# Altium PCB Auto_Switch.PcbDoc
Units mm, origin at the board's own origin, x right, y up, seen from the top; angles counter-clockwise.
Board outline 75 x 73 mm, 2 copper layers (Top Layer, Bottom Layer); 21 components, 17 nets, 64 pads, 18 vias.
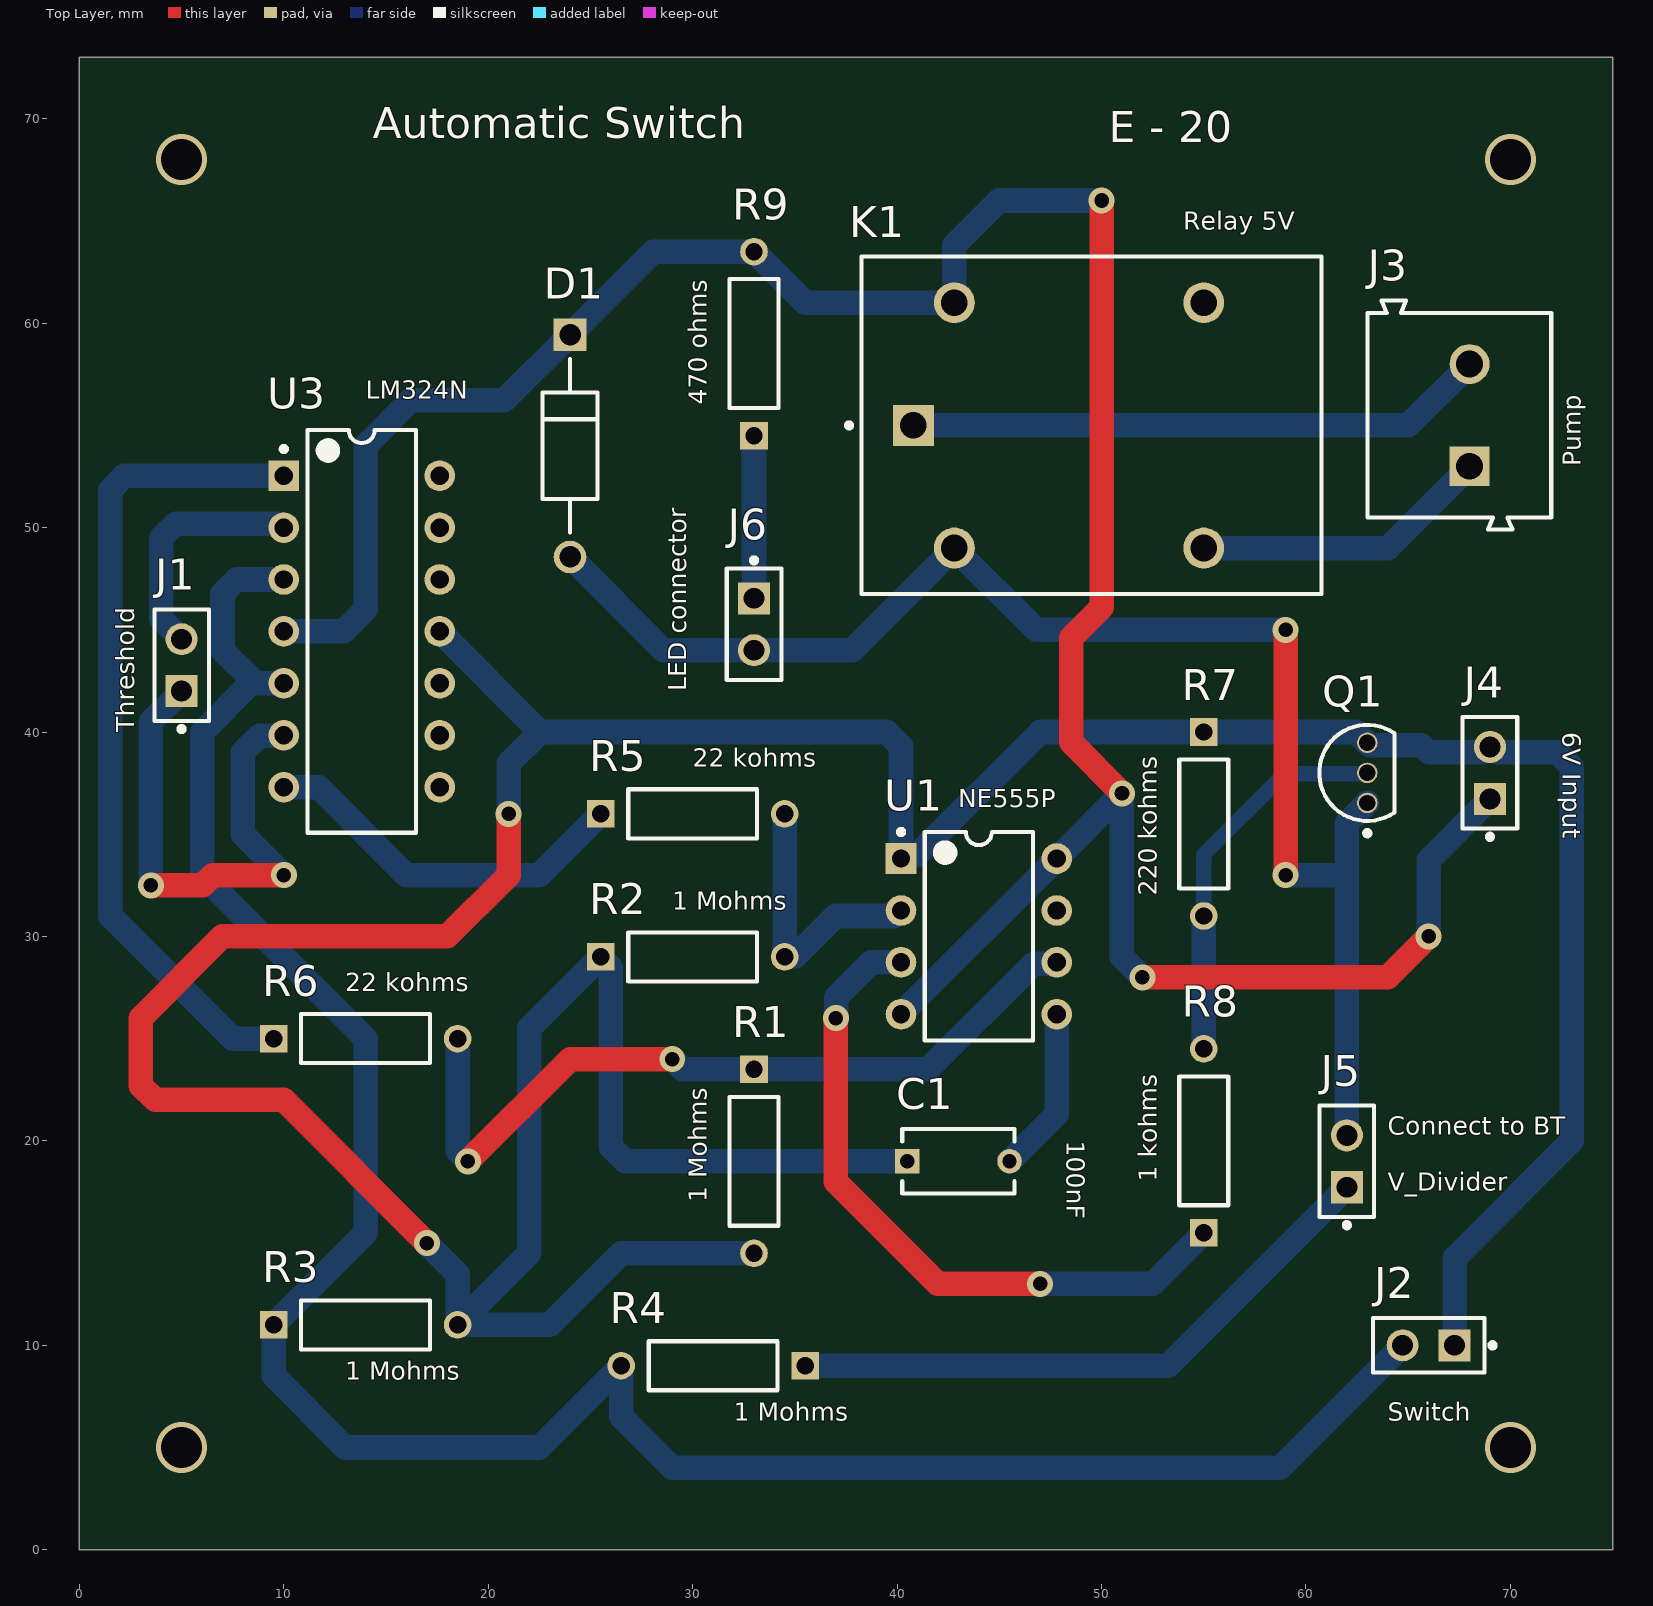
[diagram p0: Top Layer view]
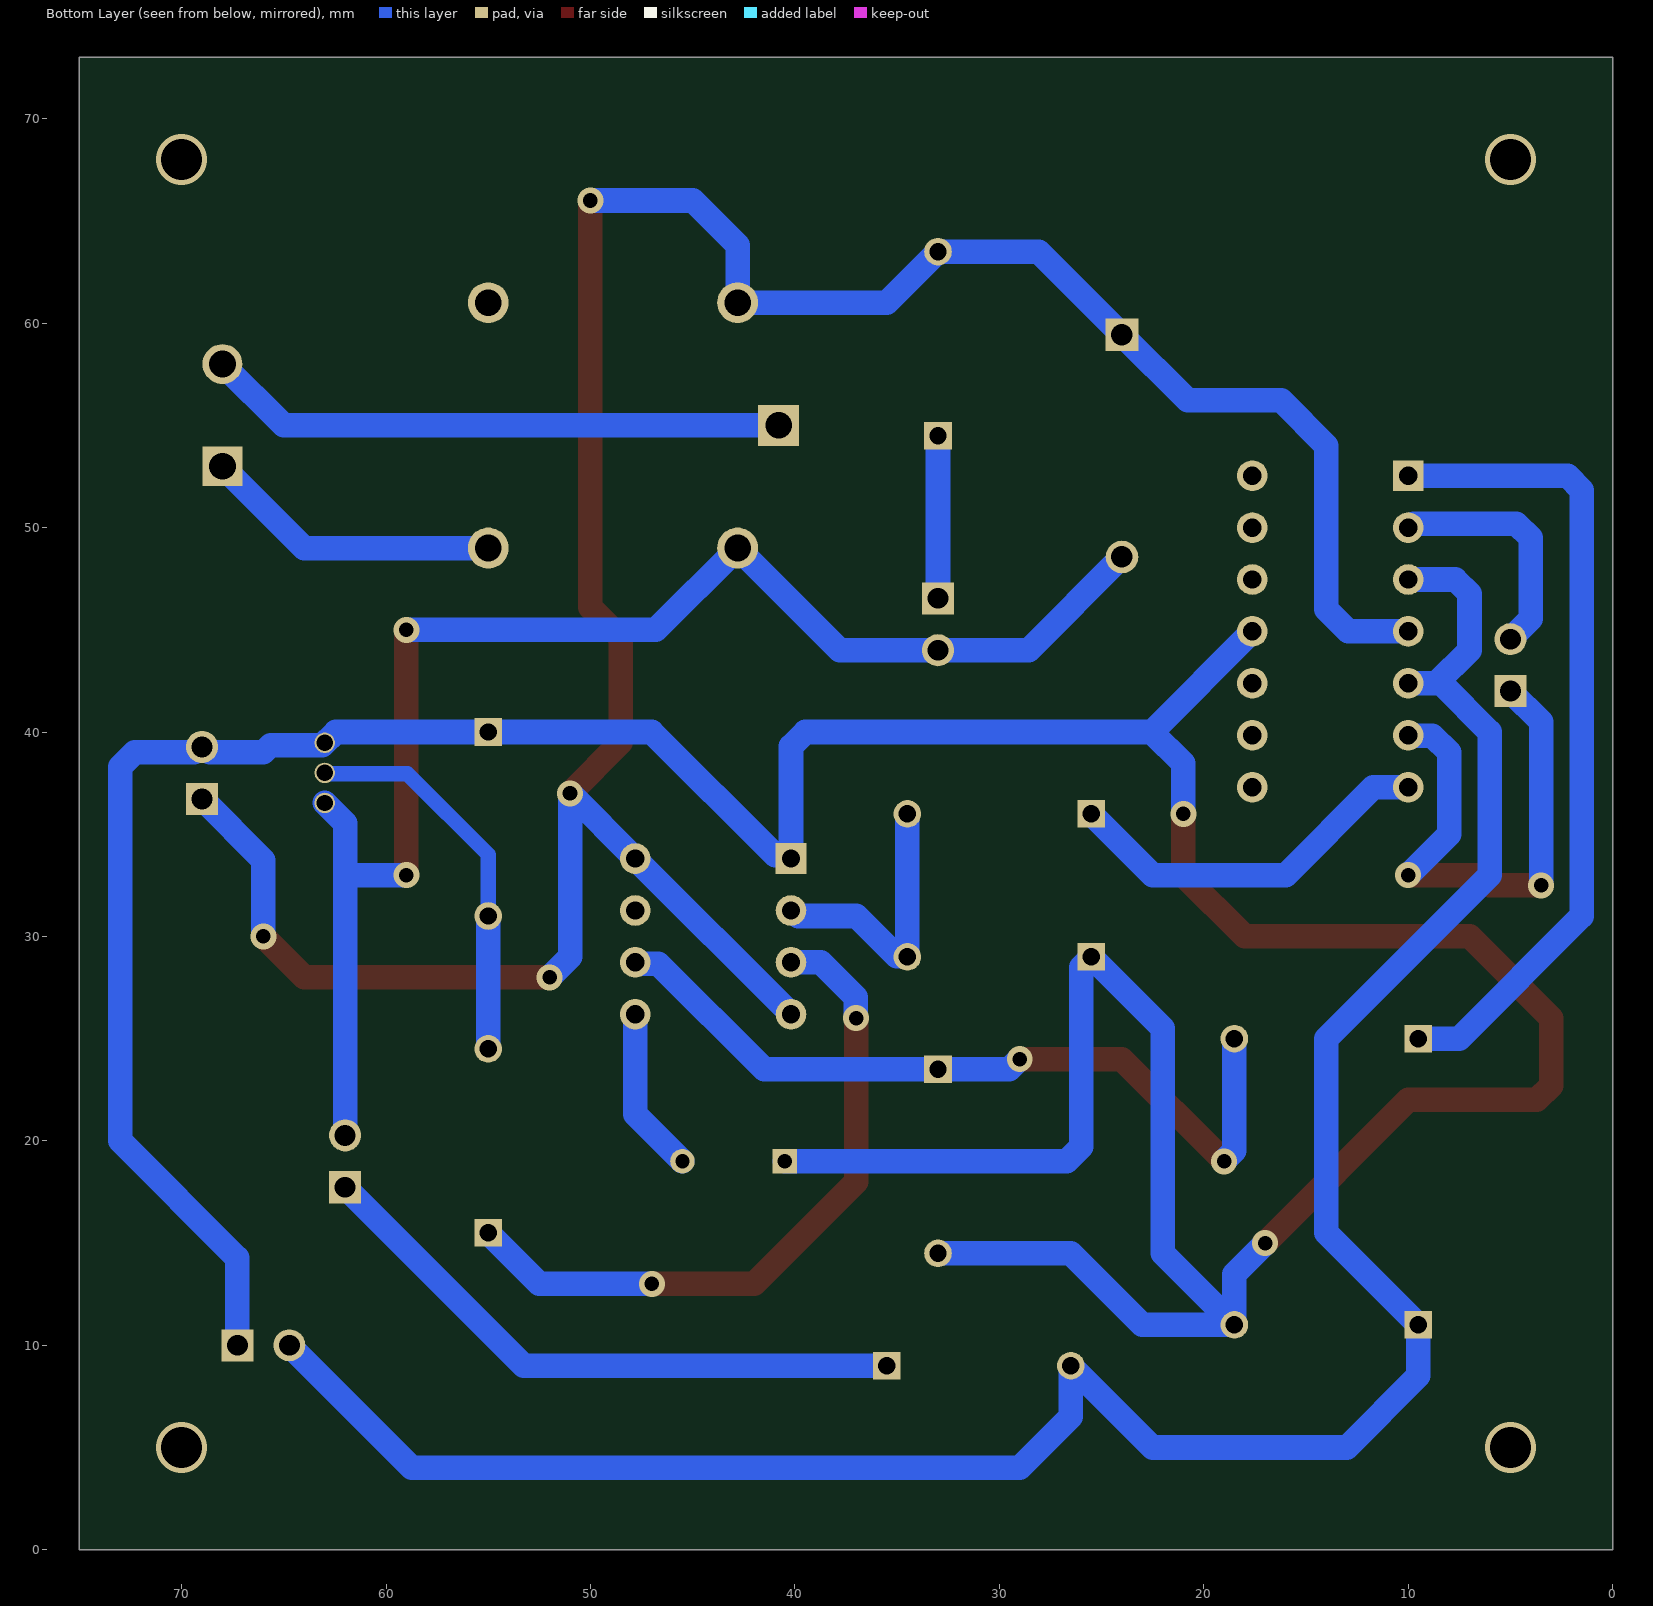
[diagram p1: Bottom Layer view, seen from below]

## Layer stack, top to bottom
Top Solder: solder mask 0.0102, Solder Resist, Dk 3.5
Top Layer: signal copper 0.0356
Dielectric 1: dielectric 0.32, FR-4, Dk 4.8
Bottom Layer: signal copper 0.0356
Bottom Solder: solder mask 0.0102, Solder Resist, Dk 3.5

## Board outline
0,0 75,0 75,73 0,73

## Design rules (kind name [scope] priority, off if disabled: settings)
Clearance [All] p1: gap=0.254 ignorepadtopadclearanceinfootprint=FALSE except(0: Arc-Hole Track-Hole SMDPad-Hole THPad-Hole Via-Hole Fill-Hole Poly-Hole Region-Hole Text-Hole)
PolygonConnect [All] p1: connectstyle=Relief reliefconductorwidth=0.254 reliefentries=4 polygonreliefangle="90 Angle" airgapwidth=0.254
RoutingVias [All] p1: holewidth=0.711 width=1.27 viastyle="Through Hole" minholewidth=0.711 minwidth=1.27 maxholewidth=0.711 maxwidth=1.27
SolderMaskExpansion [All] p1: expansion=0.102 istentingtop=FALSE
Width [All] p1: maxlimit=1.5 minlimit=0.25 preferedwidth=1.2 minimp=50.000000 maximp=50.000000 favimp=50.000000
30 further rules are at their usual default settings.

## Components (designator, comment, footprint, x,y, rotation, side; value= is the part's Value field where it differs from the comment)
C1 "RDER72E104K2K1H03B" FP-RDE2M1-MFG 43,19 r0 top
D1 "1N4007-E3/54" FP-1N4007-MFG 24,54 r270 top value=15pF
J1 "TSW-102-07-L-S" FP-TSW-102-07-L-S-MFG 5,43.27 r90 top
J2 "TSW-102-07-L-S" FP-TSW-102-07-L-S-MFG 66,10 r180 top
J3 "691101710002" 691101710002 67.5,55.5 r90 top
J4 "TSW-102-07-L-S" FP-TSW-102-07-L-S-MFG 69,38 r90 top
J5 "TSW-102-07-L-S" FP-TSW-102-07-L-S-MFG 62,19 r90 top
J6 "TSW-102-07-L-S" FP-TSW-102-07-L-S-MFG 33,45.27 r270 top
K1 "G5LE-14-DC5" FP-G5LE-14-DC5-MFG 49.5,55 r0 top
Q1 "BC547B" ONSC-TO-92-3-29-11 63,38 r90 top
R1 "MFR-25FBF52-1M" RESA60-630X240 33,19 r270 top
R2 "MFR-25FBF52-1M" RESA60-630X240 30,29 r0 top
R3 "MFR-25FBF52-1M" RESA60-630X240 14,11 r0 top
R4 "MFR-25FBF52-1M" RESA60-630X240 31,9 r180 top
R5 "MFR-25FBF52-1M" RESA60-630X240 30,36 r0 top
R6 "MFR-25FBF52-1M" RESA60-630X240 14,25 r0 top
R7 "MFR-25FBF52-1M" RESA60-630X240 55,35.5 r270 top
R8 "MFR-25FBF52-1M" RESA60-630X240 55,20 r90 top
R9 "MFR-25FBF52-1M" RESA60-630X240 33,59 r90 top
U1 "NE555P" P0008A 44,30 r0 top
U3 "LM324N" N0014A 13.81,44.92 r0 top

## Footprints (in the part's own frame and the unit in brackets; to place one, negate y for a bottom-side part, rotate by r counter-clockwise, add the part's x,y. Pads: shape width x height; smd on the part's side, far side on the other; paste and mask are expansions set on the pad)
691101710002 [mm] "5,00mm - modular - blue - Horizontal entry with pressure clamp - 12,6mm height - 02p"
  rect 1.95x1.95 hole 1.3: 1(-2.5,-0.5)
  round 1.95 hole 1.3: 2(2.5,-0.5)
  silkscreen extent -5.6,-4.5 5.6,4.5, body extent -5.6,-4.5 5.6,4.5, height 12.65
FP-1N4007-MFG [mm]
  rect 1.6x1.6 hole 1.05 paste-1000 mask+0: 1(-5.438,0)
  round 1.6 hole 1.05 paste-1000 mask+0: 2(5.438,0)
  silkscreen extent -4.24,-1.35 4.24,1.35, body extent -6.34,-1.45 6.34,1.45, height 0.25
FP-G5LE-14-DC5-MFG [mm]
  rect 2x2 hole 1.3 paste-1000 mask+0: 1(-8.7,0)
  round 2 hole 1.3 paste-1000 mask+0: 2(-6.7,-6) 3(5.5,-6) 4(5.5,6) 5(-6.7,6)
  silkscreen extent -11.97,-8.25 11.25,8.25, body extent -11.35,-8.35 11.35,8.35, height 0.25
FP-RDE2M1-MFG [mm]
  rect 1.2x1.2 hole 0.7 paste-1000 mask+0: 1(-2.5,0)
  round 1.2 hole 0.7 paste-1000 mask+0: 2(2.5,0)
  silkscreen extent -2.75,-1.58 2.75,1.58, body extent -3.2,-1.68 3.2,1.68, height 0.25
FP-TSW-102-07-L-S-MFG [mm]
  rect 1.57x1.57 hole 1.02 paste-1000 mask+0: 1(-1.27,0)
  round 1.57 hole 1.02 paste-1000 mask+0: 2(1.27,0)
  silkscreen extent -3.25,-1.33 2.73,1.34, body extent -2.83,-1.44 2.83,1.44, height 0.25
N0014A [mm] "DIP, 14-Leads, Body 19.7x6.6mm, Pitch 2.54mm"
  rect 1.5x1.5 hole 0.9: 1(-3.81,7.62)
  round 1.5 hole 0.9: 2(-3.81,5.08) 3(-3.81,2.54) 4(-3.81,0) 5(-3.81,-2.54) 6(-3.81,-5.08) 7(-3.81,-7.62) 8(3.81,-7.62) 9(3.81,-5.08) 10(3.81,-2.54) 11(3.81,0) 12(3.81,2.54) 13(3.81,5.08) 14(3.81,7.62)
  silkscreen extent -3.93,-9.85 2.65,9.85, body extent -3.95,-9.85 3.95,9.85, height 5.08
ONSC-TO-92-3-29-11 [mm] "TO, 3-Leads, Body Dia 4.7mm, Pitch 1.27mm"
  round 1 hole 0.8: 1(-1.47,0) 2(0,0) 3(1.47,0)
  silkscreen extent -3.07,-1.34 2.35,2.35, body extent -2.35,-1.33 2.36,2.36, height 7.87
P0008A [mm] "DIP, 8-Leads, Body 10.15x6.6mm, Pitch 2.54mm"
  rect 1.5x1.5 hole 0.9: 1(-3.81,3.81)
  round 1.5 hole 0.9: 2(-3.81,1.27) 3(-3.81,-1.27) 4(-3.81,-3.81) 5(3.81,-3.81) 6(3.81,-1.27) 7(3.81,1.27) 8(3.81,3.81)
  silkscreen extent -3.93,-5.1 2.65,5.23, body extent -3.95,-5.07 3.95,5.07, height 5.08
RESA60-630X240 [mm] "Axial Resistor, 2-Leads, Dia 2.4mm, Body Length 6.3mm"
  rect 1.35x1.35 hole 0.85: 1(-4.5,0)
  round 1.35 hole 0.85: 2(4.5,0)
  silkscreen extent -3.15,-1.2 3.15,1.2, body extent -3.15,-1.2 3.15,1.2, height 2.4

## Part data
C1: library part CMP-06035-020184-1, "Ceramic Capacitor 100nF ±10% 250V X7R Radial", Capacitance=100nF, Case/Package=Radial, Dielectric=X7R, Max Operating Temperature=125°C, Min Operating Temperature=-55°C, Package Quantity=500, Resistor Type=Ceramic, Tolerance=10%, Voltage Rating=250V, Height=4mm, Height - Seated (Max)=0.236inch, Lead Diameter=0.5mm, Lead Free="Lead Free", Lead Pitch=0.197inch, Lead/Base Style=Kinked, Length=5.5mm, Mount="Through Hole", Packaging=Bulk, Termination=Radial, Voltage Rating (DC)=250V, Width=0.124inch
D1: library part CMP-02540-000046-1, "DIODE GEN PURP 1KV 1A DO204AL", Capacitance=15pF, Forward Current=1A, Manufacturer=Vishay, Max Junction Temp=+150°C, Max Repetitive Reverse Voltage=1000V, Max Surge Forward Current=30A, Package=1N4007, Peak Reverse Current=30uA, Temperature="-50°C to +150°C", Temperature Range Low=-50°C, Automotive=No, Category=Diode, ComponentLink2Description=Datasheet, ComponentLink2URL=http://www.vishay.com/docs/88503/1n4001.pdf, Device Class L1="Discrete Semiconductors", Device Class L2=Diodes, Device Class L3="Rectifier Diodes", Digikey Description="DIODE GEN PURP 1KV 1A DO204AL", Height=2.7mm, Ipc Land Pattern Name=DIOPA1088W105L520D270, Lead Free=Yes, Manufacturer Part Number=1N4007-E3/54, Mouser Description="Rectifiers Vr/1000V Io/1A", Octopart=https://octopart.com/1n4007-e3%2F54-vishay-39548207, RoHS=TRUE, Temperature Range High=+150°C
J1 J2 J4 J5 J6: library part CMP-02766-001428-1, "CONN HEADER VERT 2POS 2.54MM", Color=Black, Current Rating=7.6A, Max Operating Temperature=125°C, Max Voltage Rating (AC)=550V, Min Operating Temperature=-55°C, Package Quantity=1, Connector Type="Male Pin", Contact Material=Bronze, Contact Mating Length=0.23inch, Contact Plating=Gold, Contact Type="Male Pin", Depth=2.54mm, Gender=Male, Housing Color=Black, Housing Material=Polyester, Lead Free="Lead Free", Length=5.08mm, Max Current Rating=7.6A, Mount="Through Hole", Number of Contacts=2, Number of Positions=2, Number of Rows=1, Orientation=Straight, Packaging=Bulk, Pitch=2.54mm, Radiation Hardening=No, REACH SVHC="No SVHC", RoHS Compliant=Yes, Series=TSW, Termination=Solder, Voltage Rating=550V, Width=2.54mm
J3: library part CMP-1502-03256-1, "Series 101 - 5.00 mm Horizontal Entry Modular with Pressure Clamp WR-TBL, 2 pin", Manufacturer="Wurth Elektronik", Operating Temperature=-40to105degC, Datasheet URL=http://katalog.we-online.de/em/datasheet/6911017100xx.pdf, Manufacturer URL=http://www.we-online.de, Mounting Technology=THT, Package Reference=691101710002, Packaging=Box, Part Number=691101710002, Pin Number=2, Pitch=5.00mm, Publisher=WurthElektronik
K1: library part CMP-08822-000008-1, "RELAY GEN PURPOSE SPDT 10A 5V", Ambient Temperature Range High=+85°C, Ambient Temperature Range Low=-25°C, Coil Current=79.4mA, Coil Power=400mW, Coil Resistance=63Ω, Coil Voltage=5V, Current Rating=10A, Manufacturer=Omron, Package=0, Temperature="-25°C to +85°C", Automotive=No, Category=Relay, Coil Type=Non-Latching, ComponentLink2Description=Datasheet, ComponentLink2URL=https://omronfs.omron.com/en_US/ecb/products/pdf/en-g5le.pdf, Device Class L1=Electromechanical, Device Class L2=Relays, Device Class L3="Power Relays", Digikey Description="RELAY GEN PURPOSE SPDT 10A 5V", Height=19mm, Lead Free=Yes, Manufacturer Part Number=G5LE-14-DC5, Mouser Description="General Purpose Relays Power PCB Relay SPDT Sealed 5VDC", Number of Contacts=1, Octopart=https://octopart.com/g5le-14-dc5-omron-28829, RoHS=TRUE, Standoff Height=0.5mm, Switching Current=10A, Temperature Range High=+85°C, Temperature Range Low=-25°C, Throw Configuration=SPDT
Q1: library part CMP-1048-01467-1, "Amplifier Transistor, NPN Silicon, 3-Pin TO-92, Bulk Box", Manufacturer="On Semiconductor", ComponentLink1Description="Manufacturer URL", ComponentLink1URL=http://www.onsemi.com/, ComponentLink2Description=Datasheet, ComponentLink2URL=http://www.onsemi.com/pub_link/Collateral/BC546-D.PDF, ComponentLink3Description="Package Specification", ComponentLink3URL=http://www.onsemi.cn/pub_link/Collateral/2N6426-D.PDF, DatasheetVersion="Rev. 7", fT Min (MHz)=150, IC Continuous (A)=0.1, Mounting Technology="Through Hole", PackageDescription="3-Pin Transistor Outline, Body 4.825 x 3.685 mm, Pitch 1.27 mm", PackageReference=TO-92-3-29-11_AM_SL, PackageVersion="Rev. AM", Packing="Bulk Box", PartNumber=BC547B, Polarity=NPN, RoHS=FALSE
R1 R2 R3 R4: library part CMP-1659-00070-1, "Axial Resistor, 1 MOhm, +/- 1%, 250 mW, -55 to 155 degC, 2-Pin THD, RoHS, Bulk", Case\Package=Axial, Max Operating Temperature="155 degC", Min Operating Temperature="-55 degC", Package Quantity=200, Power Rating="250 mW", Resistance="1 Mohm", Tolerance=1%, Voltage Rating="250 V", ComponentLink1Description="Manufacturer URL", ComponentLink1URL=http://www.yageo.com/, ComponentLink2Description=Datasheet, ComponentLink2URL=http://www.yageo.com/documents/recent/Yageo%20LR_MFR_2013.pdf, DatasheetVersion=Apr-13, Length="0.248 inch", Mount="Through Hole", PackageDescription="2-Pin Axial Lead, Dia 2.4 mm, Body Length 6.3 mm", PackageReference=MFR-25, Packaging=Bulk, RoHSCompliant=true
R5 R6: library part CMP-1659-00070-1, "Axial Resistor, 1 MOhm, +/- 1%, 250 mW, -55 to 155 degC, 2-Pin THD, RoHS, Bulk", Case\Package=Axial, Max Operating Temperature="155 degC", Min Operating Temperature="-55 degC", Package Quantity=200, Power Rating="250 mW", Resistance="22 kohm", Tolerance=1%, Voltage Rating="250 V", ComponentLink1Description="Manufacturer URL", ComponentLink1URL=http://www.yageo.com/, ComponentLink2Description=Datasheet, ComponentLink2URL=http://www.yageo.com/documents/recent/Yageo%20LR_MFR_2013.pdf, DatasheetVersion=Apr-13, Length="0.248 inch", Mount="Through Hole", PackageDescription="2-Pin Axial Lead, Dia 2.4 mm, Body Length 6.3 mm", PackageReference=MFR-25, Packaging=Bulk, RoHSCompliant=true
R7: library part CMP-1659-00070-1, "Axial Resistor, 1 MOhm, +/- 1%, 250 mW, -55 to 155 degC, 2-Pin THD, RoHS, Bulk", Case\Package=Axial, Max Operating Temperature="155 degC", Min Operating Temperature="-55 degC", Package Quantity=200, Power Rating="250 mW", Resistance="220 kohm", Tolerance=1%, Voltage Rating="250 V", ComponentLink1Description="Manufacturer URL", ComponentLink1URL=http://www.yageo.com/, ComponentLink2Description=Datasheet, ComponentLink2URL=http://www.yageo.com/documents/recent/Yageo%20LR_MFR_2013.pdf, DatasheetVersion=Apr-13, Length="0.248 inch", Mount="Through Hole", PackageDescription="2-Pin Axial Lead, Dia 2.4 mm, Body Length 6.3 mm", PackageReference=MFR-25, Packaging=Bulk, RoHSCompliant=true
R8: library part CMP-1659-00070-1, "Axial Resistor, 1 MOhm, +/- 1%, 250 mW, -55 to 155 degC, 2-Pin THD, RoHS, Bulk", Case\Package=Axial, Max Operating Temperature="155 degC", Min Operating Temperature="-55 degC", Package Quantity=200, Power Rating="250 mW", Resistance="1 kohm", Tolerance=1%, Voltage Rating="250 V", ComponentLink1Description="Manufacturer URL", ComponentLink1URL=http://www.yageo.com/, ComponentLink2Description=Datasheet, ComponentLink2URL=http://www.yageo.com/documents/recent/Yageo%20LR_MFR_2013.pdf, DatasheetVersion=Apr-13, Length="0.248 inch", Mount="Through Hole", PackageDescription="2-Pin Axial Lead, Dia 2.4 mm, Body Length 6.3 mm", PackageReference=MFR-25, Packaging=Bulk, RoHSCompliant=true
R9: library part CMP-1659-00070-1, "Axial Resistor, 1 MOhm, +/- 1%, 250 mW, -55 to 155 degC, 2-Pin THD, RoHS, Bulk", Case\Package=Axial, Max Operating Temperature="155 degC", Min Operating Temperature="-55 degC", Package Quantity=200, Power Rating="250 mW", Resistance="470 ohm", Tolerance=1%, Voltage Rating="250 V", ComponentLink1Description="Manufacturer URL", ComponentLink1URL=http://www.yageo.com/, ComponentLink2Description=Datasheet, ComponentLink2URL=http://www.yageo.com/documents/recent/Yageo%20LR_MFR_2013.pdf, DatasheetVersion=Apr-13, Length="0.248 inch", Mount="Through Hole", PackageDescription="2-Pin Axial Lead, Dia 2.4 mm, Body Length 6.3 mm", PackageReference=MFR-25, Packaging=Bulk, RoHSCompliant=true
U1: library part CMP-2000-04954-1, "Precision Timer, 4.5 to 16 V, 0 to 70 degC, 8-Pin DIP, Pb-Free, Tube", Manufacturer=TexasInstruments, Maximum High Level Output Current=-200mA, Maximum Low Level Output Current=200mA, Operating Supply Voltage=5, Package=8PDIP, Package Description="8-Pin Double In-line Package, Body 9.59 x 6.35 mm, Pitch 2.54 mm", Package Reference=P8, Category=Timer, Datasheet URL=http://www.ti.com/general/docs/lit/getliterature.tsp?genericPartNumber=NE555&fileType=pdf, Datasheet Version="Rev. I, 09/2014", Manufacturer URL=http://www.ti.com/, Number of Internal Timers=1, Package URL=http://www.ti.com/lit/ml/mpdi001b/mpdi001b.pdf, Packaging=Rail/Tube, Rad Hard=No, Type=Standard
U3: library part CMP-0055-00082-3, "Low Power Quad Operational Amplifier, 14-pin MDIP", Manufacturer="Texas Instruments", Package Reference=N0014A, PackageTopMarking=NSUZXYYTTE#*LM324N, PowerWise=N, Code_JEDEC=MS-001-AA, ComponentLink1Description="Datasheet URL", ComponentLink1URL=http://www.ti.com/general/docs/lit/getliterature.tsp?genericPartNumber=LM324&fileType=pdf, CompType=Amplifiers, PackageDescription="MDIP, .750 x .250 x.130in, 14 Lead, .100in Pitch", PinCount=14, RoHS=N

## Via types
v1: diameter 1.27, hole 0.711, Top Layer to Bottom Layer, 14 vias
v2: diameter 2.5, hole 2, Top Layer to Bottom Layer, 4 vias

## Nets (pads, with @x,y where several pads share a name; then routed paths per layer and width w, separated by ;. In a path a pad name is that pad's centre, name@x,y a point inside that pad or via, vN(x,y) a via of type N, cw(c..) or ccw(c..) an arc to the next point about the centre after c; other vN are vias at no path point)
GND: C1.1 J2.1 J4.2 Q1.3 R1.2 R2.1 R3.2 R7.1 U1.1 U3.11 | length 212.3
  Top Layer w1.2: v1(17,15) 10,22 3.703,22 3,22.703 3,26 7,30 18,30 21,33 v1(21,36)
  Bottom Layer w1.2: v1(17,15) 17,14.981 18.5,13.481 R3.2 ; U3.11 22.54,40 ; v1(21,36) 21,38.46 22.54,40 ; R1.2 26.5,14.5 23,11 R3.2 ; C1.1 26.703,19 26,19.703 26,28.5 R2.1 22,25.5 22,14.5 R3.2 ; J2.1 67.27,14.27 73,20 73,38.297 72.297,39 69.37,39 J4.2@69.1,39.27 ; J4.2 J4.2@69.1,39.27 ; 22.54,40 39.487,40 40.19,39.297 U1.1 40.34,33.96 40.96,33.96 47,40 R7.1 62.47,40 63.116,39.354 65.646,39.354 66,39 68.63,39 68.9,39.27 J4.2@69.1,39.27
NetC1_2: C1.2 U1.5 | length 8.1
  Bottom Layer w1.2: C1.2 47.81,21.31 U1.5
NetD1_2: D1.2 J5.2 J6.2 K1.2 Q1.1 | length 72.3
  Top Layer w1.2: v1(59,33) v1(59,45)
  Bottom Layer w1.2: D1.2 28.562,44 J6.2 37.8,44 K1.2 46.8,45 v1(59,45) ; v1(59,33) 62,33 ; J5.2 62,33 ; Q1.1 62,35.53 62,33
NetJ1_1: J1.1 U3.6 | length 26
  Top Layer w1.2: v1(3.5,32.5) 6.035,32.5 6.535,33 v1(10,33)
  Bottom Layer w1.2: v1(3.5,32.5) 3.5,40.5 J1.1 ; v1(10,33) 8,35 8,39 8.817,39.817 9.977,39.817 U3.6
NetJ1_2: J1.2 U3.2 | length 11.7
  Bottom Layer w1.2: J1.2 4,45.54 4,49.495 4.703,50.198 9.721,50.198 9.919,50 U3.2
NetJ2_2: J2.2 R3.1 R4.2 U3.3 U3.5 | length 114.1
  Bottom Layer w1.2: 8.38,42.38 6,40 6,33 14,25 14,15.5 R3.1 9.5,8.5 13,5 22.5,5 R4.2 26.5,6.5 29,4 58.73,4 J2.2 ; U3.5 8.62,42.38 7,44 7,46.757 7.703,47.46 U3.3
NetJ3_1: J3.1 K1.3 | length 14.7
  Bottom Layer w1.2: K1.3 64,49 J3.1
NetJ3_2: J3.2 K1.1 | length 28.4
  Bottom Layer w1.2: K1.1 65,55 J3.2
NetJ5_1: J5.1 R4.1 | length 30.1
  Bottom Layer w1.2: R4.1 53.27,9 J5.1
NetJ6_1: J6.1 R9.1 | length 8
  Bottom Layer w1.2: J6.1 R9.1
NetQ1_2: Q1.2 R7.2 R8.2 | length 19.2
  Bottom Layer w0.75: R7.2 55,34 58.952,37.952 62.952,37.952 Q1.2
  Bottom Layer w1.2: R8.2 R7.2
NetR1_1: R1.1 R6.2 U1.6 | length 39.5
  Top Layer w1.2: v1(19,19) 24,24 v1(29,24)
  Bottom Layer w1.2: R6.2 18.5,19.519 19,19.019 v1(19,19) ; v1(29,24) 29.019,24 29.519,23.5 R1.1 41.5,23.5 46.673,28.673 47.753,28.673 U1.6
NetR2_2: R2.2 R5.2 U1.2 | length 13.6
  Bottom Layer w1.2: R5.2 R2.2 34.529,29.029 35.029,29.029 37,31 39.839,31 40.109,31.27 U1.2
NetR5_1: R5.1 U3.7 | length 18.5
  Bottom Layer w1.2: U3.7 11.7,37.3 16,33 22.494,33 22.497,32.997 R5.1
NetR6_1: R6.1 U3.1 | length 40.1
  Bottom Layer w1.2: R6.1 7.5,25 1.5,31 1.5,51.837 2.203,52.54 U3.1
NetR8_1: R8.1 U1.3 | length 34
  Top Layer w1.2: v1(37,26) 37,18 42,13 v1(47,13)
  Bottom Layer w1.2: v1(37,26) 37.013,26.013 37.013,27.013 38.73,28.73 U1.3 ; v1(47,13) 52.5,13 R8.1
VCC: D1.1 J4.1 K1.5 R9.2 U1.4 U1.8 U3.4 | length 135.3
  Top Layer w1.2: v1(50,66) 50,46.106 48.511,44.617 48.511,39.489 v1(51,37) ; v1(52,28) 64,28 v1(66,30)
  Bottom Layer w1.2: U3.4 12.92,44.92 14,46 14,54 16.221,56.221 20.783,56.221 D1.1 28.062,63.5 R9.2 35.5,61 K1.5 42.8,63.8 45,66 v1(50,66) ; U1.4 U1.8 v1(51,37) ; v1@51,36.981 51,29 v1(52,28) ; v1(66,30) 66,33.73 J4.1
pads on no net: K1.4 U1.7 U3.8 U3.9 U3.10 U3.12 U3.13 U3.14
copper on no net:
  other v2: 5,5 70,5 5,68 70,68

## Silkscreen, mask and mechanical layers (free items; w line width, h text height)
Top Overlay:
  text "Automatic Switch" at 14.354,69.054 h1.52
  text "E - 20" at 50.354,68.854 h1.52
  text "Relay 5V" at 54,64.286 h1.52
  text "LM324N" at 14,56.017 h1.52
  text "470 ohms" at 30.983,56 h1.52 r90
  text "Pump" at 73.729,53 h1.52 r90
  text "LED connector" at 29.984,42 h1.52 r90
  text "Threshold" at 2.984,40 h1.52 r90
  text "6V Input" at 72.271,40 h1.52 r270
  text "22 kohms" at 29.999,38.016 h1.52
  text "NE555P" at 43,36.017 h1.52
  text "220 kohms" at 52.983,31.999 h1.52 r90
  text "1 Mohms" at 29,31.016 h1.52
  text "22 kohms" at 12.999,27.016 h1.52
  text "Connect to BT" at 64,20.017 h1.52
  text "100nF" at 48.017,20 h1.52 r270
  text "1 kohms" at 52.984,18 h1.52 r90
  text "V_Divider" at 64.001,17.271 h1.52
  text "1 Mohms" at 30.984,17 h1.52 r90
  text "1 Mohms" at 13,8.016 h1.52
  text "1 Mohms" at 32,6.016 h1.52
  text "Switch" at 64,6.017 h1.52